# EAGLE board LED Bar Board (EAGLE 8.3.1)
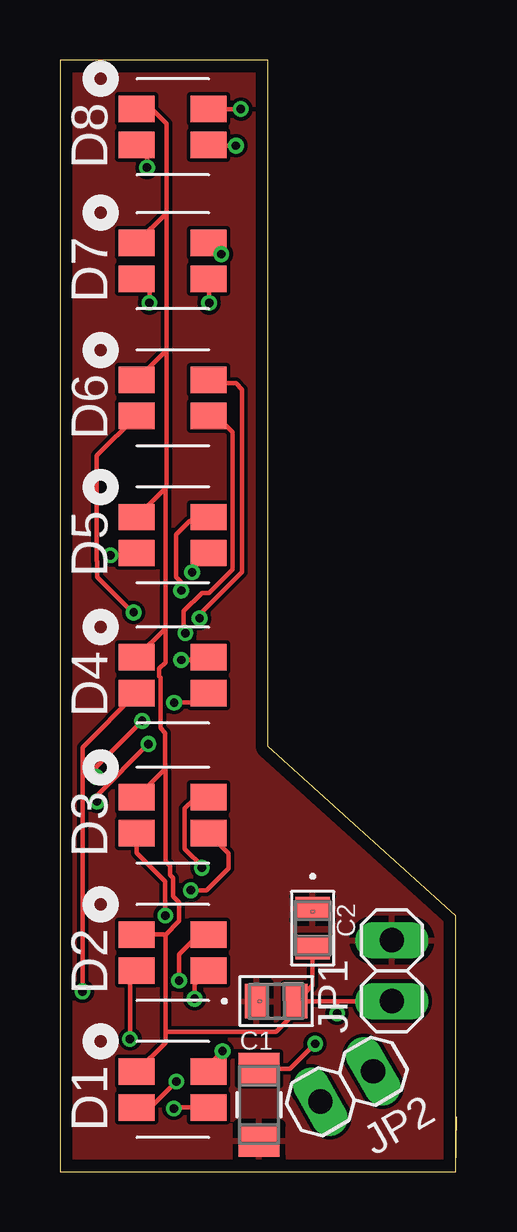
[diagram p0: board, top side]
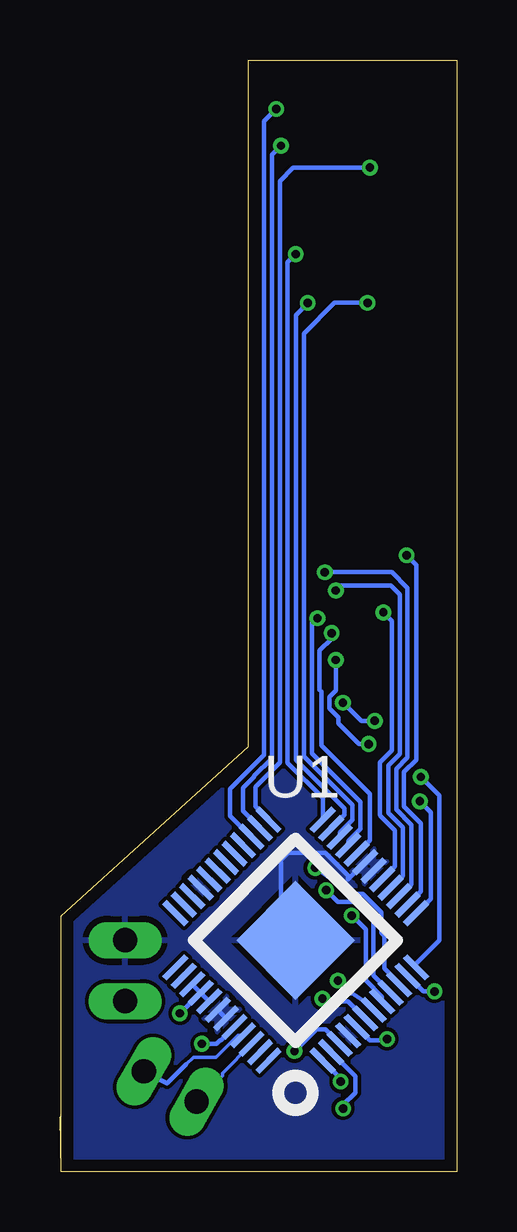
[diagram p1: board, bottom side, seen from below]

Size 16.56 x 46.34 mm. Coordinates in mm from the lower left corner, seen from the top.
Outline: 16.51,0 0,0 0,46.35 8.69,46.35 8.69,17.73 16.51,10.67 16.51,0
Outline: 16.51,0 16.56,2.29
Copper layers (1*16): Top 0.035mm / dielectric 1.6mm / Bottom 0.035mm
Design rules "Elecrow_2-layer_PCB_eagle_rule": minimum track width 6mil, minimum drill 12mil, track to track 6mil, track to pad 6mil, pad to pad 6mil, via to via 8mil, smd to smd 0mil, copper to edge 20mil, drill to drill 10mil, minimum pad ring 6mil, minimum via ring 6mil, stop-mask expansion 0mil, vias tented up to drill 100mil, thermal gap 10mil

## Footprints (pad centres in the part's own frame; a part is rotated, then mirrored left to right if it is on the bottom)
0805 = smd 0.965 x 1.448: 1 -0.826,0; 2 0.826,0
YAG_CC0805 = smd 0.965 x 1.448: 1 -0.826,0; 2 0.826,0
ASMB-MTB0_LED = smd 1.1 x 1.5: 1 -0.75,-1.5; 2 -0.75,1.5; 3 0.75,1.5; 4 0.75,-1.5
1X02 = drill 1.016 long: 1 -1.27,0; 2 1.27,0
RC1206N-M = smd 1.321 x 1.702: 1 -1.499,0; 2 1.499,0
TQFP-48 = smd 1.3 x 0.25: 1 -4.35,2.75; 2 -4.35,2.25; 3 -4.35,1.75; 4 -4.35,1.25; 5 -4.35,0.75; 6 -4.35,0.25; 7 -4.35,-0.25; 8 -4.35,-0.75; 9 -4.35,-1.25; 10 -4.35,-1.75; 11 -4.35,-2.25; 12 -4.35,-2.75; 25 4.35,-2.75; 26 4.35,-2.25; 27 4.35,-1.75; 28 4.35,-1.25; 29 4.35,-0.75; 30 4.35,-0.25; 31 4.35,0.25; 32 4.35,0.75; 33 4.35,1.25; 34 4.35,1.75; 35 4.35,2.25; 36 4.35,2.75 | smd 0.25 x 1.3: 13 -2.75,-4.35; 14 -2.25,-4.35; 15 -1.75,-4.35; 16 -1.25,-4.35; 17 -0.75,-4.35; 18 -0.25,-4.35; 19 0.25,-4.35; 20 0.75,-4.35; 21 1.25,-4.35; 22 1.75,-4.35; 23 2.25,-4.35; 24 2.75,-4.35; 37 2.75,4.35; 38 2.25,4.35; 39 1.75,4.35; 40 1.25,4.35; 41 0.75,4.35; 42 0.25,4.35; 43 -0.25,4.35; 44 -0.75,4.35; 45 -1.25,4.35; 46 -1.75,4.35; 47 -2.25,4.35; 48 -2.75,4.35 | smd 3.5 x 3.5: EP 0,0

## Placement (x,y rotation side)
C1  0.1uF  [0805]  9.02,7.11 0 top
C2  1uF  [YAG_CC0805]  10.54,10.16 270 top
D1  [ASMB-MTB0_LED]  4.7,3.43 270 top
D2  [ASMB-MTB0_LED]  4.7,9.14 270 top
D3  [ASMB-MTB0_LED]  4.7,14.86 270 top
D4  [ASMB-MTB0_LED]  4.7,20.7 270 top
D5  [ASMB-MTB0_LED]  4.7,26.54 270 top
D6  [ASMB-MTB0_LED]  4.7,32.26 270 top
D7  [ASMB-MTB0_LED]  4.7,37.97 270 top
D8  [ASMB-MTB0_LED]  4.7,43.56 270 top
JP1  [1X02]  13.84,8.38 90 top
JP2  [1X02]  11.96,3.56 210 top
R1  3k3  [RC1206N-M]  8.31,2.79 90 top
U1  [TQFP-48]  6.73,9.65 135 bottom

## Library data of the parts
C1 = 0.1uF X7R Ceramic Capacitor; COPYRIGHT: Copyright C 2015 Accelerated Designs. All rights reserved; MANUFACTURER_PART_NUMBER: 08055C104KAT2A; VENDOR: Vendor
C2 = 1uF X7R Ceramic Capacitor; COPYRIGHT: Copyright C 2015 Accelerated Designs. All rights reserved; MANUFACTURER_PART_NUMBER: CC0805KKX7R7BB105; VENDOR: Vendor
D1-D8 U1 = thanics_robotics
JP1 JP2 = pinhead
R1 = 3.3k-resistor; MANUFACTURER_PART_NUMBER: RC1206JR073K3L; VENDOR: Yageo

## Nets
+5V: C1.2 C2.2 D1.1 D2.1 D3.1 D4.1 D5.1 D6.1 D7.1 D8.1 JP1.1 U1.39 U1.40 U1.41
GND: C1.1 C2.1 JP1.2 R1.1 U1.4 U1.18 U1.19 U1.33 U1.42 U1.43 U1.EP
N$1: D1.4 U1.1
N$2: D1.3 U1.2
N$3: D2.3 U1.6
N$4: D1.2 U1.3
N$5: D2.4 U1.5
N$6: R1.2 U1.44
N$7: D3.4 U1.8
N$8: D3.3 U1.9
N$9: D3.2 U1.10
N$10: D4.4 U1.11
N$11: D4.3 U1.12
N$12: D4.2 U1.13
N$13: D5.4 U1.14
N$14: D5.3 U1.15
N$15: D5.2 U1.16
N$16: D6.4 U1.17
N$17: D6.3 U1.20
N$18: D6.2 U1.21
N$19: D7.4 U1.22
N$20: D7.3 U1.23
N$21: D7.2 U1.24
N$22: D8.4 U1.25
N$23: D8.3 U1.26
N$24: D8.2 U1.27
N$25: D2.2 U1.7
SCL: JP2.2 U1.46
SDA: JP2.1 U1.45

## Tracks (layer width: path | path; a pad name or v marks a point on that pad's centre or on a via)
+5V  (via drill 0.35)
  Top 0.178: D8.1 3.82,44.31 4.45,43.69 4.45,39.97 | 4.45,39.97 D7.1 | 4.45,39.97 4.45,34.25 | 4.45,34.25 D6.1 | 4.45,34.25 4.45,28.54 4.4,28.49 | 4.4,28.49 D5.1 | 4.4,28.49 4.4,22.65 | 4.4,22.65 D4.1 | D3.1 4.4,16.81 4.4,16.69 | 4.4,9.81 4.4,9.88 4.97,10.45 4.97,11.24 4.72,11.48 4.72,12.25 4.6,12.37 4.6,12.75 4.4,12.95 4.4,16.69 | 4.4,9.81 4.4,5.84 | 4.4,5.84 4.4,5.38 D1.1 | 4.4,5.84 9.02,5.84 9.53,6.35 9.53,6.79 C1.2 | JP1.1 11.62,7.11 | C2.2 10.54,7.77 9.88,7.11 C1.2 | v11.56,6.6 11.56,7.05 11.62,7.11 | 4.4,22.65 4.4,21.24 4.14,20.98 4.14,20.65 4.19,20.6 4.19,18.49 4.39,18.29 4.39,16.69 4.4,16.69 | D2.1 4.32,9.89 4.4,9.81 | 11.62,7.11 C1.2
  Bottom 0.178: U1.39 U1.40 | U1.40 v11.56,6.6 | U1.40 U1.41
GND
  Bottom 0.178: U1.42 U1.43 | U1.19 4.55,12.19 4.55,12.36 5.48,13.29 7.05,13.29 7.34,13 7.34,11.18 7.19,11.02 7.19,10.11 U1.EP
  pour Bottom: 0.13,46.23 16.38,46.23 16.38,0 0.13,0
  pour Top: -0.13,46.23 16.38,46.23 16.38,0 -0.13,0
N$1  (via drill 0.35)
  Top 0.178: D1.4 3.77,2.68 v4.85,3.76
  Bottom 0.178: v4.85,3.76 4.85,3.88 U1.1
N$2  (via drill 0.35)
  Top 0.178: D1.3 4.79,2.68 v4.75,2.64
  Bottom 0.178: v4.75,2.64 4.75,2.79 4.24,3.3 4.24,3.98 U1.2
N$3  (via drill 0.35)
  Top 0.178: v5.61,7.21 5.61,7.81 D2.3
  Bottom 0.178: U1.6 4.55,7.11 5.51,7.11 v5.61,7.21
N$4  (via drill 0.35)
  Top 0.178: D1.2 6.2,4.45 v6.78,5.03
  Bottom 0.178: v6.78,5.03 5.87,5.94 5.5,5.94 U1.3
N$5  (via drill 0.35)
  Top 0.178: v2.92,5.54 2.92,8.12 D2.4
  Bottom 0.178: U1.5 3.63,5.49 2.97,5.49 v2.92,5.54
N$6  (via drill 0.35)
  Top 0.178: R1.2 9.6,4.29 v10.64,5.33
  Bottom 0.178: v10.64,5.33 10.03,5.33 9.88,5.49 9.84,5.49 U1.44
N$7  (via drill 0.35)
  Top 0.178: D3.4 3.2,13.3 4.39,12.11 v4.39,10.68
  Bottom 0.178: U1.8 3.13,7.3 3.81,7.98 3.81,10.1 v4.39,10.68
N$8  (via drill 0.35)
  Top 0.178: D3.3 7.04,13.27 7.04,12.65 6.12,11.73 v5.46,11.73
  Bottom 0.178: U1.9 2.77,7.47 3.48,8.18 3.48,9.4 | 3.48,9.4 | 3.48,9.4 3.48,10.67 3.58,10.67 4.16,11.25 4.98,11.25 v5.46,11.73
N$9  (via drill 0.35)
  Top 0.178: D3.2 6.08,15.49 5.56,15.49 5.21,15.14 5.21,13.51 5.21,13.46 5.35,13.32 5.82,12.85 v5.92,12.67
  Bottom 0.178: U1.10 2.42,7.88 3.02,8.48 3.02,9.83 3.15,9.95 3.15,10.8 3.92,11.58 4.5,11.58 5.23,12.3 5.4,12.3 v5.92,12.67
N$10  (via drill 0.35)
  Top 0.178: v0.94,7.52 0.94,17.69 D4.4
  Bottom 0.178: U1.11 2.05,8.17 1.4,7.52 v0.94,7.52
N$11  (via drill 0.35)
  Top 0.178: v1.51,16.46 1.51,16.88 v3.43,18.8 | v4.76,19.56 5.81,19.56 D4.3
  Bottom 0.178: U1.12 1.71,8.68 0.74,9.65 0.74,15.69 v1.51,16.46 | v3.43,18.8 4,18.8 v4.76,19.56
N$12  (via drill 0.35)
  Top 0.178: v5.05,21.34 6.08,21.34 D4.2 | v1.55,15.44 1.55,15.7 v3.68,17.83
  Bottom 0.178: U1.13 1.69,10.78 1.09,11.38 1.09,14.99 v1.55,15.44 | v3.68,17.83 4.09,17.83 4.95,18.69 4.95,18.95 5.33,19.32 5.33,19.79 5.06,20.07 5.06,21.18 v5.05,21.34
N$13  (via drill 0.35)
  Top 0.178: v2.11,25.7 3.11,25.7 D5.4
  Bottom 0.178: U1.14 2.05,11.14 1.5,11.68 1.5,14.53 2.21,15.24 2.21,16.66 1.7,17.17 1.7,25.3 v2.11,25.7
N$14  (via drill 0.35)
  Top 0.178: v5.51,24.99 5.51,25.11 D5.3
  Bottom 0.178: U1.15 2.4,11.49 1.91,11.99 1.91,14.47 2.54,15.1 2.54,16.8 2.06,17.28 2.06,24.34 2.72,24.99 v5.51,24.99
N$15  (via drill 0.35)
  Top 0.178: v5.05,24.23 5.05,24.59 4.85,24.79 4.85,26.57 5.41,27.13 6.03,27.13 D5.2
  Bottom 0.178: U1.16 2.76,11.84 2.26,12.34 2.26,14.36 2.87,14.97 2.87,16.94 2.39,17.41 2.39,24.06 2.77,24.43 4.85,24.43 v5.05,24.23
N$16  (via drill 0.35)
  Top 0.178: v3.07,23.32 3.02,23.32 1.55,24.79 1.55,25.46 1.54,25.47 1.54,29.85 D6.4
  Bottom 0.178: U1.17 2.59,12.73 2.59,14.22 3.2,14.83 3.2,14.86 3.23,14.88 3.23,17.07 2.72,17.57 2.72,22.97 v3.07,23.32
N$17  (via drill 0.35)
  Top 0.178: D6.3 6.52,31.51 7.19,30.84 7.19,27.95 7.19,27.94 7.19,25.1 6.22,24.13 5.92,24.13 5.16,23.37 5.16,22.53 v5.23,22.46
  Bottom 0.178: v5.23,22.46 5.23,22.23 5.73,21.73 5.73,20.08 5.66,20.02 5.66,17.78 3.63,15.75 3.63,13.81 U1.20
N$18  (via drill 0.35)
  Top 0.178: D6.2 6.34,32.87 7.34,32.87 7.59,32.61 7.59,24.99 5.82,23.22 v5.82,23.07
  Bottom 0.178: U1.21 4.54,13.8 4.04,14.3 4.04,15.42 6.06,17.44 6.06,22.61 6.06,22.83 | 6.06,22.83 6.06,23.07 | 6.06,22.83 v5.82,23.07
N$19  (via drill 0.35)
  Top 0.178: v3.73,36.22 3.73,36.69 D7.4
  Bottom 0.178: U1.22 4.89,14.15 4.37,14.68 4.37,15.29 6.39,17.31 6.39,34.93 5.11,36.22 v3.73,36.22
N$20  (via drill 0.35)
  Top 0.178: v6.22,36.22 6.22,37.2 D7.3
  Bottom 0.178: U1.23 5.25,14.34 4.7,14.88 4.7,15.15 6.73,17.18 6.73,35.72 v6.22,36.22
N$21  (via drill 0.35)
  Top 0.178: v6.73,38.25 6.67,38.25 D7.2
  Bottom 0.178: U1.24 5.6,15.58 7.06,17.04 7.06,37.92 v6.73,38.25
N$22  (via drill 0.35)
  Top 0.178: v3.63,41.86 3.63,42.38 D8.4
  Bottom 0.178: U1.25 7.86,14.7 8.41,15.24 8.41,16.04 7.39,17.06 7.39,41.3 6.83,41.86 v3.63,41.86
N$23  (via drill 0.35)
  Top 0.178: v7.34,42.77 6.24,42.77 D8.3
  Bottom 0.178: U1.26 8.22,14.34 8.92,15.04 8.92,16 8.46,16.46 8.46,16.5 7.72,17.24 7.72,42.39 v7.34,42.77
N$24  (via drill 0.35)
  Top 0.178: v7.54,44.3 D8.2
  Bottom 0.178: U1.27 8.61,13.97 9.47,14.83 9.47,15.95 8.05,17.37 8.05,43.79 v7.54,44.3
N$25  (via drill 0.35)
  Top 0.178: v4.97,7.98 4.97,9.06 5.61,9.7 6.01,9.7 D2.2
  Bottom 0.178: U1.7 3.57,6.91 4.36,7.44 4.44,7.44 v4.97,7.98
SCL
  Bottom 0.152: U1.46 8.57,5.32 9.78,4.11 9.78,4.01 JP2.2
SDA
  Bottom 0.152: U1.45 9.13,5.69 10.04,4.78 11,4.78 11.3,4.47
  Bottom 0.178: JP2.1 12.09,3.68 11.3,4.47

## Text on the board
bPlace: U1